# EAGLE board 009pcb1 (EAGLE 9.6.2)

Size 160 x 100 mm. Coordinates in mm from the lower left corner, seen from the top.
Outline: 0,0 160,0 160,100 0,100 0,0
Copper layers (1*16): Top 0.035mm / dielectric 1.5mm / Bottom 0.035mm
Design rules "default": minimum track width 6mil, minimum drill 0.35mm, track to track 6mil, track to pad 6mil, pad to pad 6mil, via to via 6mil, smd to smd 6mil, copper to edge 40mil, drill to drill 6mil, minimum pad ring 10mil, minimum via ring 8mil, stop-mask expansion 4mil, vias tented up to drill 0mil, thermal gap 10mil

## Footprints (pad centres in the part's own frame; a part is rotated, then mirrored left to right if it is on the bottom)
1X03 = drill 1.016 pad 1.88: 1 0,0; 2 2.54,0; 3 5.08,0
1X01 = drill 1.016 pad 1.88: 1 0,0
1X07 = drill 1.016 pad 1.88: 1 0,0; 2 2.54,0; 3 5.08,0; 4 7.62,0; 5 10.16,0; 6 12.7,0; 7 15.24,0
1X02 = drill 1.016 pad 1.88: 1 0,0; 2 2.54,0

## Placement (x,y rotation side)
BOOSTER  [1X03]  53.34,33.02 0 top
BUZZER_1  [1X01]  41.91,45.72 270 top
BUZZER_2  [1X01]  41.91,43.18 270 top
HALL_SENSOR  [1X03]  29.21,38.1 180 top
LED_GREEN_ANODE  [1X01]  15.24,38.1 0 top
LED_GREEN_CATHODE  [1X01]  15.24,40.64 0 top
LED_RED_ANODE  [1X01]  19.05,38.1 0 top
LED_RED_CATHODE  [1X01]  19.05,40.64 0 top
LED_WHITE_ANODE  [1X01]  43.18,53.34 0 top
LED_WHITE_CATHODE  [1X01]  40.64,53.34 0 top
LM317  [1X03]  58.42,53.34 270 top
MICROCONTROLLER_1  [1X07]  15.24,16.51 90 top
MICROCONTROLLER_2  [1X07]  27.94,16.51 90 top
POLYCHARGER_1  [1X07]  34.29,15.24 90 top
POLYCHARGER_2  [1X07]  46.99,15.24 90 top
R1_54_1  [1X01]  58.42,38.1 180 top
R1_54_2  [1X01]  48.26,38.1 180 top
R2_54_1  [1X01]  33.02,50.8 270 top
R2_54_2  [1X01]  33.02,40.64 270 top
R_1K_1  [1X01]  39.37,45.72 270 top
R_1K_2  [1X01]  39.37,35.56 270 top
R_10_1  [1X01]  15.24,43.18 0 top
R_10_2  [1X01]  15.24,53.34 0 top
R_12_1  [1X03]  55.88,53.34 270 top
R_12_2  [1X03]  45.72,53.34 270 top
R_56_1  [1X01]  19.05,43.18 0 top
R_56_2  [1X01]  19.05,53.34 0 top
TRANSISTOR1_1  [1X01]  33.02,38.1 0 top
TRANSISTOR1_2  [1X02]  33.02,35.56 0 top
TRANSISTOR2_1  [1X01]  45.72,38.1 270 top
TRANSISTOR2_2  [1X02]  43.18,38.1 270 top

## Library data of the parts
BOOSTER BUZZER_1 BUZZER_2 HALL_SENSOR LED_GREEN_ANODE LED_GREEN_CATHODE LED_RED_ANODE LED_RED_CATHODE LED_WHITE_ANODE LED_WHITE_CATHODE LM317 MICROCONTROLLER_1 MICROCONTROLLER_2 POLYCHARGER_1 POLYCHARGER_2 R1_54_1 R1_54_2 R2_54_1 R2_54_2 R_1K_1 R_1K_2 R_10_1 R_10_2 R_12_1 R_12_2 R_56_1 R_56_2 TRANSISTOR1_1 TRANSISTOR1_2 TRANSISTOR2_1 TRANSISTOR2_2 = SparkFun-Connectors

## Nets
5V: MICROCONTROLLER_2.7 POLYCHARGER_1.7
A0: MICROCONTROLLER_1.7 R2_54_1.1
A1: LED_RED_ANODE.1 MICROCONTROLLER_1.6
A2: MICROCONTROLLER_1.5 POLYCHARGER_2.5
A3: LED_GREEN_ANODE.1 MICROCONTROLLER_1.4
ADJUST: LED_WHITE_ANODE.1 LM317.1 R_12_2.1 R_12_2.2 R_12_2.3
BASE: R1_54_2.1 R2_54_2.1 TRANSISTOR1_1.1 TRANSISTOR2_1.1
CATHODE_G: LED_GREEN_CATHODE.1 R_10_1.1
CATHODE_R: LED_RED_CATHODE.1 R_56_1.1
COLLECTOR: BUZZER_1.1 LED_WHITE_CATHODE.1 R_1K_1.1 TRANSISTOR1_2.2 TRANSISTOR2_2.2
GND: BOOSTER.2 HALL_SENSOR.2 MICROCONTROLLER_2.6 POLYCHARGER_1.6 R_10_2.1 R_56_2.1 TRANSISTOR1_2.1 TRANSISTOR2_2.1
LIPO: BOOSTER.1 HALL_SENSOR.1 LM317.3 POLYCHARGER_1.2
MI: MICROCONTROLLER_2.3
MO: MICROCONTROLLER_2.4
N$15: POLYCHARGER_2.7
N$16: POLYCHARGER_2.6
N$18: POLYCHARGER_2.4
N$19: POLYCHARGER_2.3
N$20: POLYCHARGER_2.2
N$21: POLYCHARGER_2.1
N$24: POLYCHARGER_1.5
N$25: POLYCHARGER_1.4
N$26: POLYCHARGER_1.3
N$28: POLYCHARGER_1.1
RX: MICROCONTROLLER_2.1
SCK: MICROCONTROLLER_2.2
SCL: HALL_SENSOR.3 MICROCONTROLLER_1.2
SDA: MICROCONTROLLER_1.3 R1_54_1.1
TX: MICROCONTROLLER_1.1
VOUT_BOOSTER: BOOSTER.3 BUZZER_2.1 R_1K_2.1
VOUT_LM317: LM317.2 R_12_1.1 R_12_1.2 R_12_1.3

## Tracks (layer width: path | path; a pad name or v marks a point on that pad's centre or on a via)
5V  (1 unrouted)
A0  (1 unrouted)
A1  (1 unrouted)
A2  (1 unrouted)
A3  (1 unrouted)
ADJUST  (4 unrouted)
BASE  (3 unrouted)
CATHODE_G  (1 unrouted)
CATHODE_R  (1 unrouted)
COLLECTOR  (4 unrouted)
GND  (7 unrouted)
LIPO  (3 unrouted)
SCL  (1 unrouted)
SDA  (1 unrouted)
VOUT_BOOSTER  (2 unrouted)
VOUT_LM317  (3 unrouted)